# EAGLE board input-selector (EAGLE 6.4)
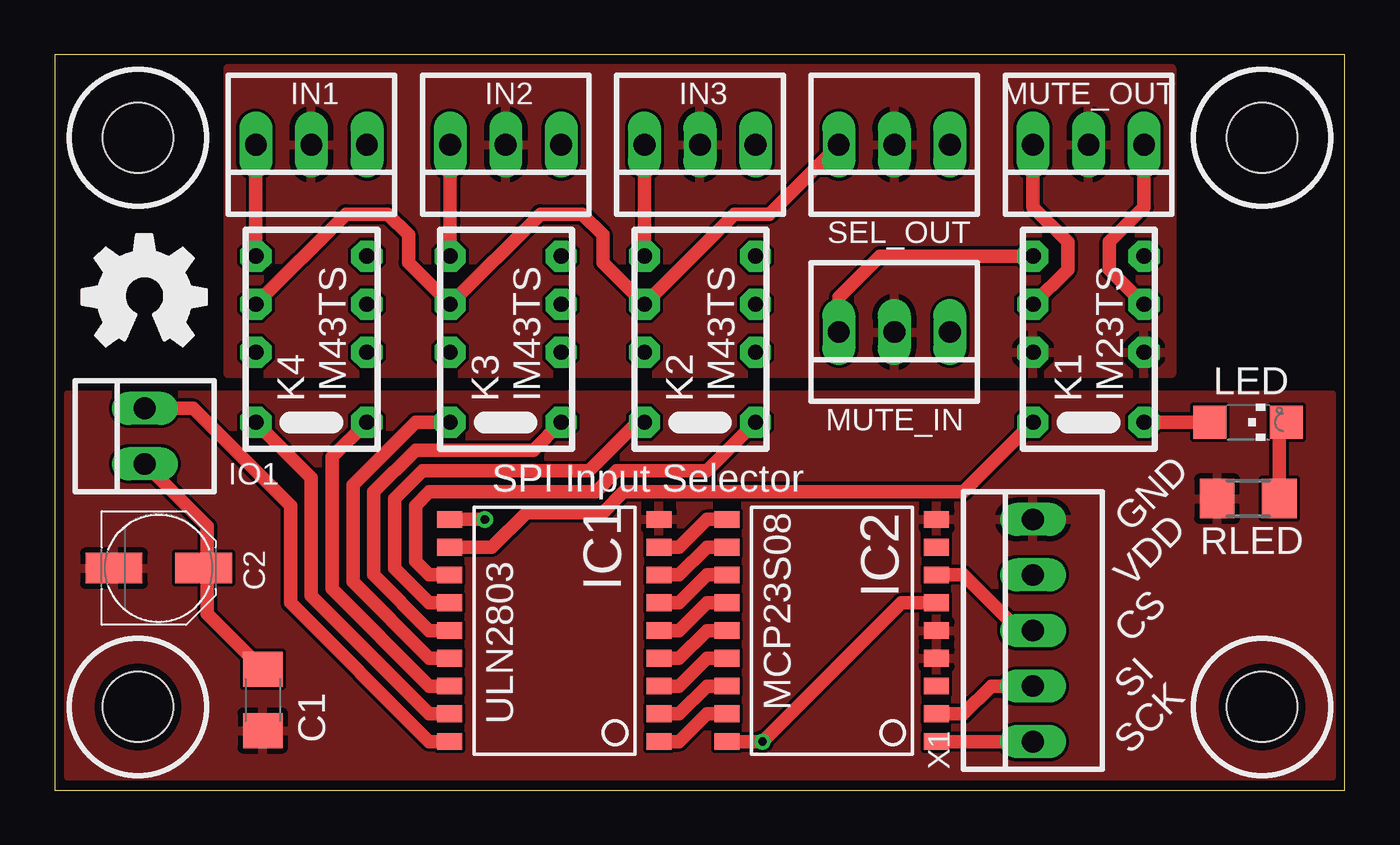
[diagram p0: board, top side]
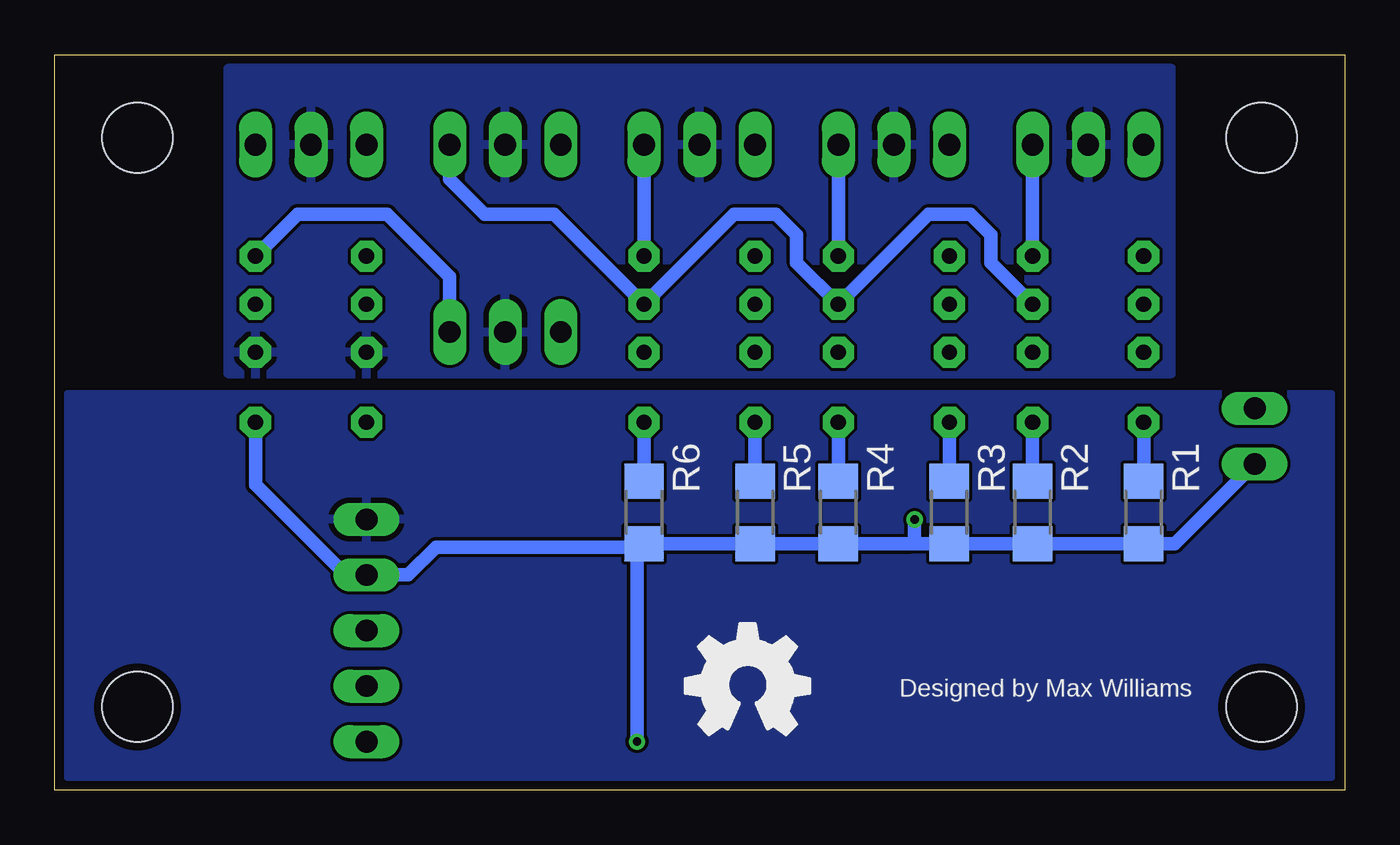
[diagram p1: board, bottom side, seen from below]

Size 59.03 x 33.64 mm. Coordinates in mm from the lower left corner, seen from the top.
Outline: 0,0 59.03,0 59.03,33.64 0,33.64 0,0
Copper layers (1*16): Top 0.0356mm / dielectric 1.5011mm / Bottom 0.0356mm
Design rules "LaenPCBOrder": minimum track width 6mil, minimum drill 13mil, track to track 6mil, track to pad 6mil, pad to pad 6mil, via to via 6mil, smd to smd 6mil, copper to edge 15mil, drill to drill 6mil, minimum pad ring 7mil, minimum via ring 7mil, stop-mask expansion 3mil, vias tented up to drill 0mil, thermal gap 10mil
Holes 3.2 mm at 3.81,29.84 55.24,29.84 3.81,3.81 55.24,3.81

## Footprints (pad centres in the part's own frame; a part is rotated, then mirrored left to right if it is on the bottom)
C1206 = smd 1.6 x 1.8: 1 -1.4,0; 2 1.4,0
PANASONIC_C = smd 2.6 x 1.4: + 2.05,0; - -2.05,0
SO-18W = smd 0.762 x 1.143: 1 -5.08,-4.788; 2 -3.81,-4.788; 3 -2.54,-4.788; 4 -1.27,-4.788; 5 0,-4.788; 6 1.27,-4.788; 7 2.54,-4.788; 8 3.81,-4.788; 9 5.08,-4.788; 10 5.08,4.788; 11 3.81,4.788; 12 2.54,4.788; 13 1.27,4.788; 14 0,4.788; 15 -1.27,4.788; 16 -2.54,4.788; 17 -3.81,4.788; 18 -5.08,4.788
22-23-2031 = drill 1 long: 1 -2.54,0; 2 0,0; 3 2.54,0
22-23-2021 = drill 1 long: 1 -1.27,0; 2 1.27,0
IM43TS = drill 0.7 pad 1.422 octagon: 1 2.54,-3.81; 2 2.54,-0.61; 3 2.54,1.59; 4 2.54,3.79; 5 -2.54,3.79; 6 -2.54,1.59; 7 -2.54,-0.61; 8 -2.54,-3.81
CHIPLED_1206 = smd 1.5 x 1.5: A 0,-1.75; C 0,1.75
R1206 = smd 1.6 x 1.803: 1 -1.422,0; 2 1.422,0
22-23-2051 = drill 1 long: 1 -5.08,0; 2 -2.54,0; 3 0,0; 4 2.54,0; 5 5.08,0

## Placement (x,y rotation side)
C1  [C1206]  9.53,4.13 270 top
C2  [PANASONIC_C]  4.76,10.16 0 top
IC1  ULN2803  [SO-18W]  22.86,7.3 90 top
IC2  MCP23S08  [SO-18W]  35.56,7.3 90 top
IN1  [22-23-2031]  11.75,29.53 180 top
IN2  [22-23-2031]  20.64,29.53 180 top
IN3  [22-23-2031]  29.53,29.53 180 top
IO1  22-23-2021  [22-23-2021]  4.13,16.19 90 top
K1  IM23TS  [IM43TS]  47.31,20.64 0 top
K2  IM43TS  [IM43TS]  29.53,20.64 0 top
K3  IM43TS  [IM43TS]  20.64,20.64 0 top
K4  IM43TS  [IM43TS]  11.75,20.64 0 top
LED  [CHIPLED_1206]  54.61,16.83 270 top
LOGO1  OSHW_LOGO_FILLX0200-NT  [OSHW_FILLX200_NOTEXT]  30.16,2.54 0 bottom
LOGO2  OSHW_LOGO_FILLX0200-NT  [OSHW_FILLX200_NOTEXT]  1.27,20.32 0 top
MUTE_IN  [22-23-2031]  38.42,20.95 180 top
MUTE_OUT  [22-23-2031]  47.31,29.53 180 top
R1  47R  [R1206]  9.21,12.7 270 bottom
R2  47R  [R1206]  14.29,12.7 270 bottom
R3  47R  [R1206]  18.1,12.7 270 bottom
R4  47R  [R1206]  23.18,12.7 270 bottom
R5  47R  [R1206]  26.99,12.7 270 bottom
R6  47R  [R1206]  32.07,12.7 270 bottom
RLED  2.4k  [R1206]  54.61,13.34 180 top
SEL_OUT  [22-23-2031]  38.42,29.53 180 top
X1  22-23-2051  [22-23-2051]  44.77,7.3 90 top

## Library data of the parts
C1 C2 R1-R6 RLED = rcl
IC1 = uln-udn-mine
IC2 = microchip-mine
IN1-IN3 MUTE_IN MUTE_OUT SEL_OUT = con-molex; MF: MOLEX; MPN: 22-23-2031; OC_FARNELL: 1462950; OC_NEWARK: 30C0862
IO1 = con-molex; MF: MOLEX; MPN: 22-23-2021; OC_FARNELL: 1462926; OC_NEWARK: 25C3832
K1-K4 = relay-te
LED = led
LOGO1 LOGO2 = ohw-logo
X1 = con-molex; MF: MOLEX; MPN: 22-23-2051; OC_FARNELL: 1462952; OC_NEWARK: 38C9178

## Nets
+5V: C1.1 C2.+ IC1.10 IC2.6 IC2.18 IO1.1 K1.1 LED.A R1.2 R2.2 R3.2 R4.2 R5.2 R6.2 X1.4
AGND: IN1.2 IN2.2 IN3.2 K1.2 K1.7 MUTE_IN.2 MUTE_OUT.2 SEL_OUT.2
CS: IC2.7 X1.3
DGND: C1.2 C2.- IC1.9 IC2.4 IC2.5 IC2.9 RLED.2 X1.5
INL: K2.3 K3.3 K4.3 SEL_OUT.1
INR: K2.6 K3.6 K4.6 SEL_OUT.3
N$1: IC1.1 IC2.17
N$2: IC1.2 IC2.16
N$3: IC1.3 IC2.15
N$4: IC1.5 IC2.13
N$5: IC1.6 IC2.12
N$6: IC1.7 IC2.11
N$7: IC1.4 IC2.14
N$8: IC1.8 IC2.10
N$9: IC1.16 K4.1 R2.1
N$10: IC1.14 K3.1 R4.1
N$11: IC1.13 K2.8 R5.1
N$12: IC1.12 K2.1 R6.1
N$13: IC1.15 K3.8 R3.1
N$14: IC1.11 K1.8
N$15: IC1.17 K4.8 R1.1
N$16: IC1.18 IO1.2
N$17: K1.6 MUTE_OUT.3
N$18: K1.3 MUTE_OUT.1
N$31: IN1.1 K4.4
N$32: IN1.3 K4.5
N$33: IN2.1 K3.4
N$34: IN2.3 K3.5
N$35: IN3.1 K2.4
N$36: IN3.3 K2.5
N$67: LED.C RLED.1
OUTL: K1.4 MUTE_IN.1
OUTR: K1.5 MUTE_IN.3
SCK: IC2.1 X1.1
SI: IC2.2 X1.2

## Tracks (layer width: path | path; a pad name or v marks a point on that pad's centre or on a via)
+5V  (via drill 0.38 pad 0.61)
  Top 0.61: IC2.18 v32.38,2.22 38.73,8.57 IC2.6 | IO1.1 6.99,12.06 6.99,10.16 | 6.99,10.16 6.99,8.07 C1.1 | C2.+ 6.99,10.16 | LED.A K1.1 | IC1.10 v19.68,12.38
  Bottom 0.61: v19.68,12.38 19.68,11.43 19.85,11.28 | K1.1 49.85,13.97 45.72,9.84 X1.4 42.86,9.84 41.59,11.11 32.23,11.11 R6.2 | R6.2 R5.2 R4.2 19.85,11.28 | IO1.1 7.77,11.28 R1.2 R2.2 R3.2 19.85,11.28 | v32.38,2.22 32.38,10.96 R6.2
AGND
  pour Top: 7.94,33.02 51.12,33.02 51.12,19.05 7.94,19.05
  pour Bottom: 7.94,33.02 51.12,33.02 51.12,19.05 7.94,19.05
CS
  Top 0.61: X1.3 44.13,7.3 41.59,9.84 IC2.7
DGND
  pour Top: 0.64,18.1 58.42,18.1 58.42,0.64 0.64,0.64
  pour Bottom: 0.64,18.1 58.42,18.1 58.42,0.64 0.64,0.64
INL
  Bottom 0.61: K4.3 16.19,24.13 16.19,25.4 17.14,26.35 19.05,26.35 K3.3 25.08,24.13 25.08,25.4 26.04,26.35 27.94,26.35 K2.3 36.2,26.35 39.37,26.35 40.96,27.94 SEL_OUT.1
INR
  Top 0.61: K4.6 13.34,26.35 15.24,26.35 16.19,25.4 16.19,24.13 K3.6 22.23,26.35 24.13,26.35 25.08,25.4 25.08,24.13 K2.6 31.11,26.35 32.7,26.35 SEL_OUT.3
N$1
  Top 0.61: IC1.1 28.57,2.22 29.84,3.49 IC2.17
N$2
  Top 0.61: IC1.2 28.57,3.49 29.84,4.76 IC2.16
N$3
  Top 0.61: IC1.3 28.57,4.76 29.84,6.03 IC2.15
N$4
  Top 0.61: IC1.5 28.57,7.3 29.84,8.57 IC2.13
N$5
  Top 0.61: IC2.12 29.84,9.84 28.57,8.57 IC1.6
N$6
  Top 0.61: IC2.11 29.84,11.11 28.57,9.84 IC1.7
N$7
  Top 0.61: IC1.4 28.57,6.03 29.84,7.3 IC2.14
N$8
  Top 0.61: IC2.10 29.84,12.38 28.57,11.11 IC1.8
N$9
  Top 0.61: IC1.16 17.14,4.76 12.7,9.21 12.7,15.24 K4.1
  Bottom 0.61: R2.1 K4.1
N$10
  Top 0.61: IC1.14 17.14,7.3 14.61,9.84 14.61,13.65 16.51,15.56 21.91,15.56 K3.1
  Bottom 0.61: R4.1 K3.1
N$11
  Top 0.61: IC1.13 17.14,8.57 15.56,10.16 15.56,13.34 16.83,14.61 24.45,14.61 26.67,16.83 K2.8
  Bottom 0.61: R5.1 K2.8
N$12
  Top 0.61: IC1.12 17.14,9.84 16.51,10.48 16.51,13.02 17.14,13.65 24.77,13.65 25.72,14.61 29.84,14.61 K2.1
  Bottom 0.61: R6.1 K2.1
N$13
  Top 0.61: IC1.15 17.14,6.03 13.65,9.53 13.65,13.97 16.51,16.83 K3.8
  Bottom 0.61: R3.1 K3.8
N$14
  Top 0.61: K1.8 41.59,13.65 26.04,13.65 25.08,12.7 21.59,12.7 20,11.11 IC1.11
N$15
  Top 0.61: IC1.17 17.14,3.49 11.75,8.89 11.75,14.29 K4.8
  Bottom 0.61: R1.1 K4.8
N$16
  Top 0.61: IC1.18 17.14,2.22 10.79,8.57 10.79,13.02 6.35,17.46 IO1.2
N$17
  Top 0.61: MUTE_OUT.3 44.77,26.67 46.35,25.08 46.35,23.82 K1.6
N$18
  Top 0.61: K1.3 48.26,23.81 48.26,25.08 49.85,26.67 MUTE_OUT.1
N$31
  Bottom 0.61: K4.4 IN1.1
N$32
  Top 0.61: IN1.3 K4.5
N$33
  Bottom 0.61: K3.4 IN2.1
N$34
  Top 0.61: IN2.3 K3.5
N$35
  Bottom 0.61: K2.4 IN3.1
N$36
  Top 0.61: IN3.3 K2.5
N$67
  Top 0.61: RLED.1 56.03,16.5 LED.C
OUTL
  Bottom 0.61: MUTE_IN.1 40.96,23.5 43.81,26.35 47.92,26.35 K1.4
OUTR
  Top 0.61: MUTE_IN.3 35.88,22.54 37.76,24.43 K1.5
SCK
  Top 0.61: X1.1 IC2.1
SI
  Top 0.61: X1.2 42.86,4.76 41.59,3.49 IC2.2

## Text on the board
tNames: SPI Input Selector | GND | VDD | CS | SI | SCK
bNames: Designed by Max Williams